# Altium PCB CONTROL_BOARD.PcbDoc
Units mm, origin at the board's own origin, x right, y up, seen from the top; angles counter-clockwise.
Board outline 50 x 50 mm, 2 copper layers (Top Layer, Bottom Layer), stack 1.571 mm thick; 35 components, 26 nets, 200 pads, 23 vias.
Unrouted connection lines stored in the file: 3.
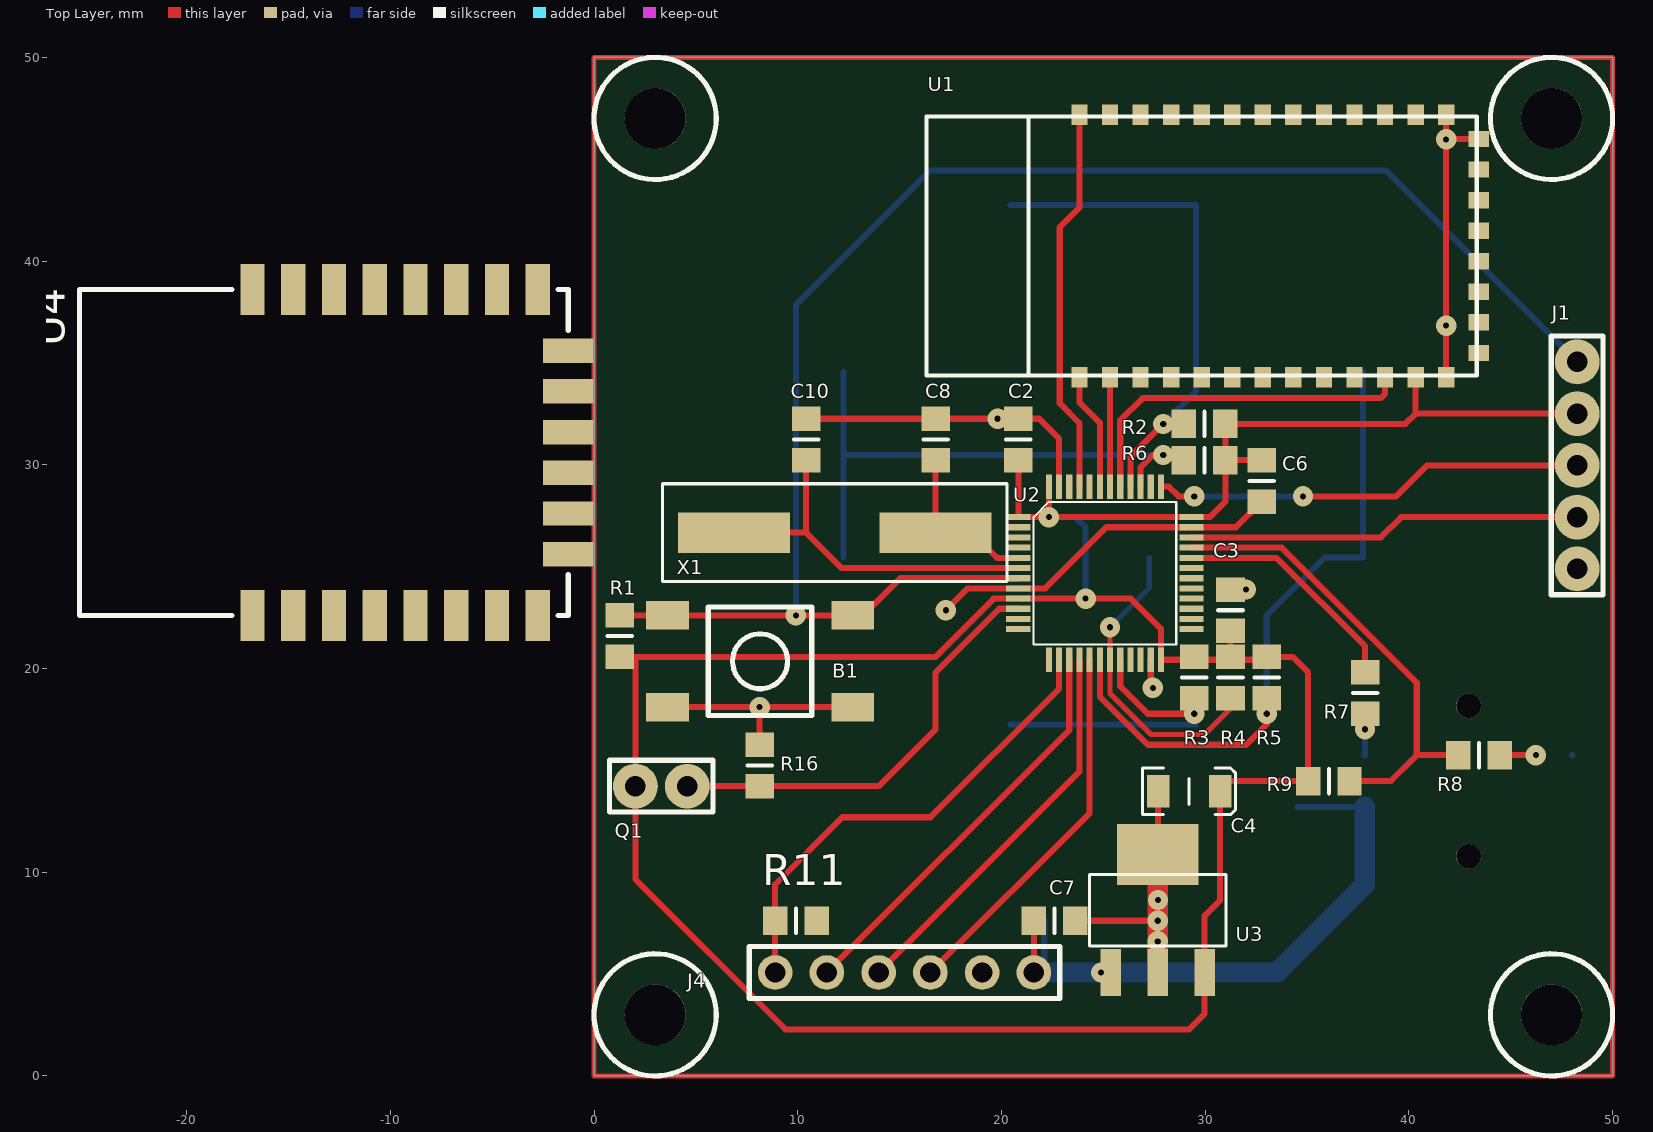
[diagram p0: Top Layer view]
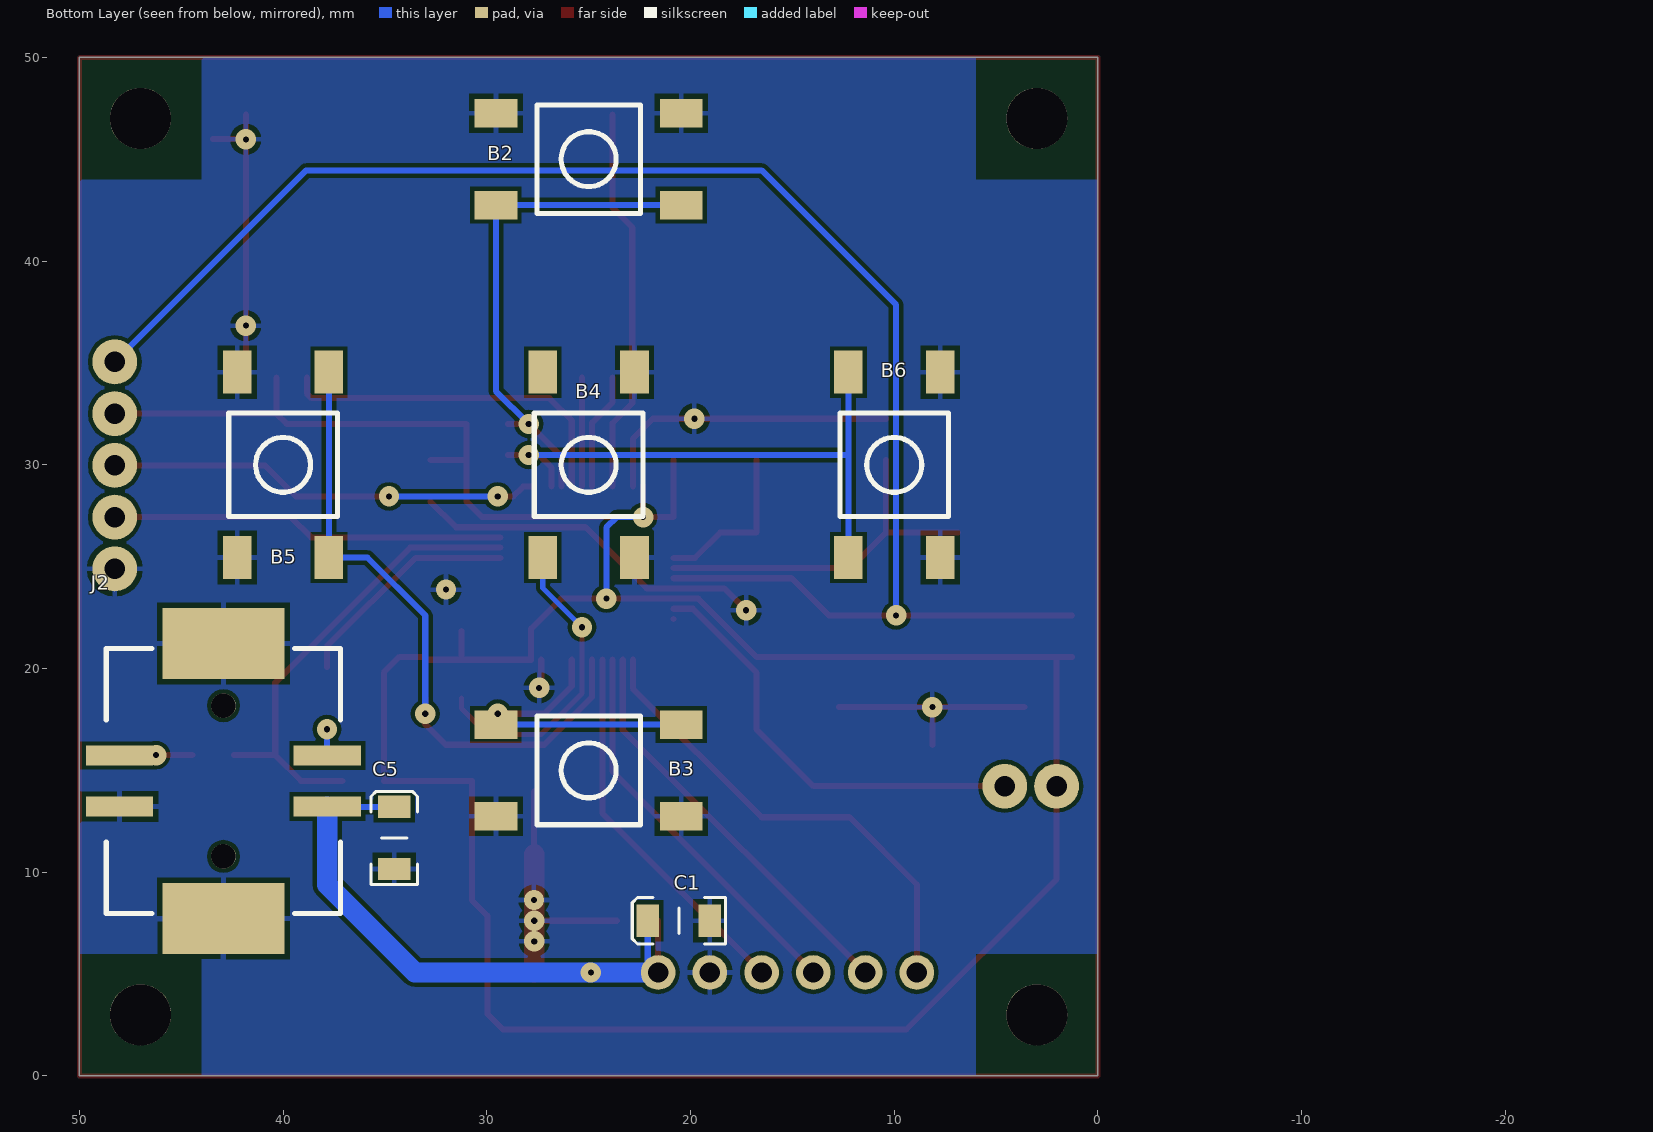
[diagram p1: Bottom Layer view, seen from below]
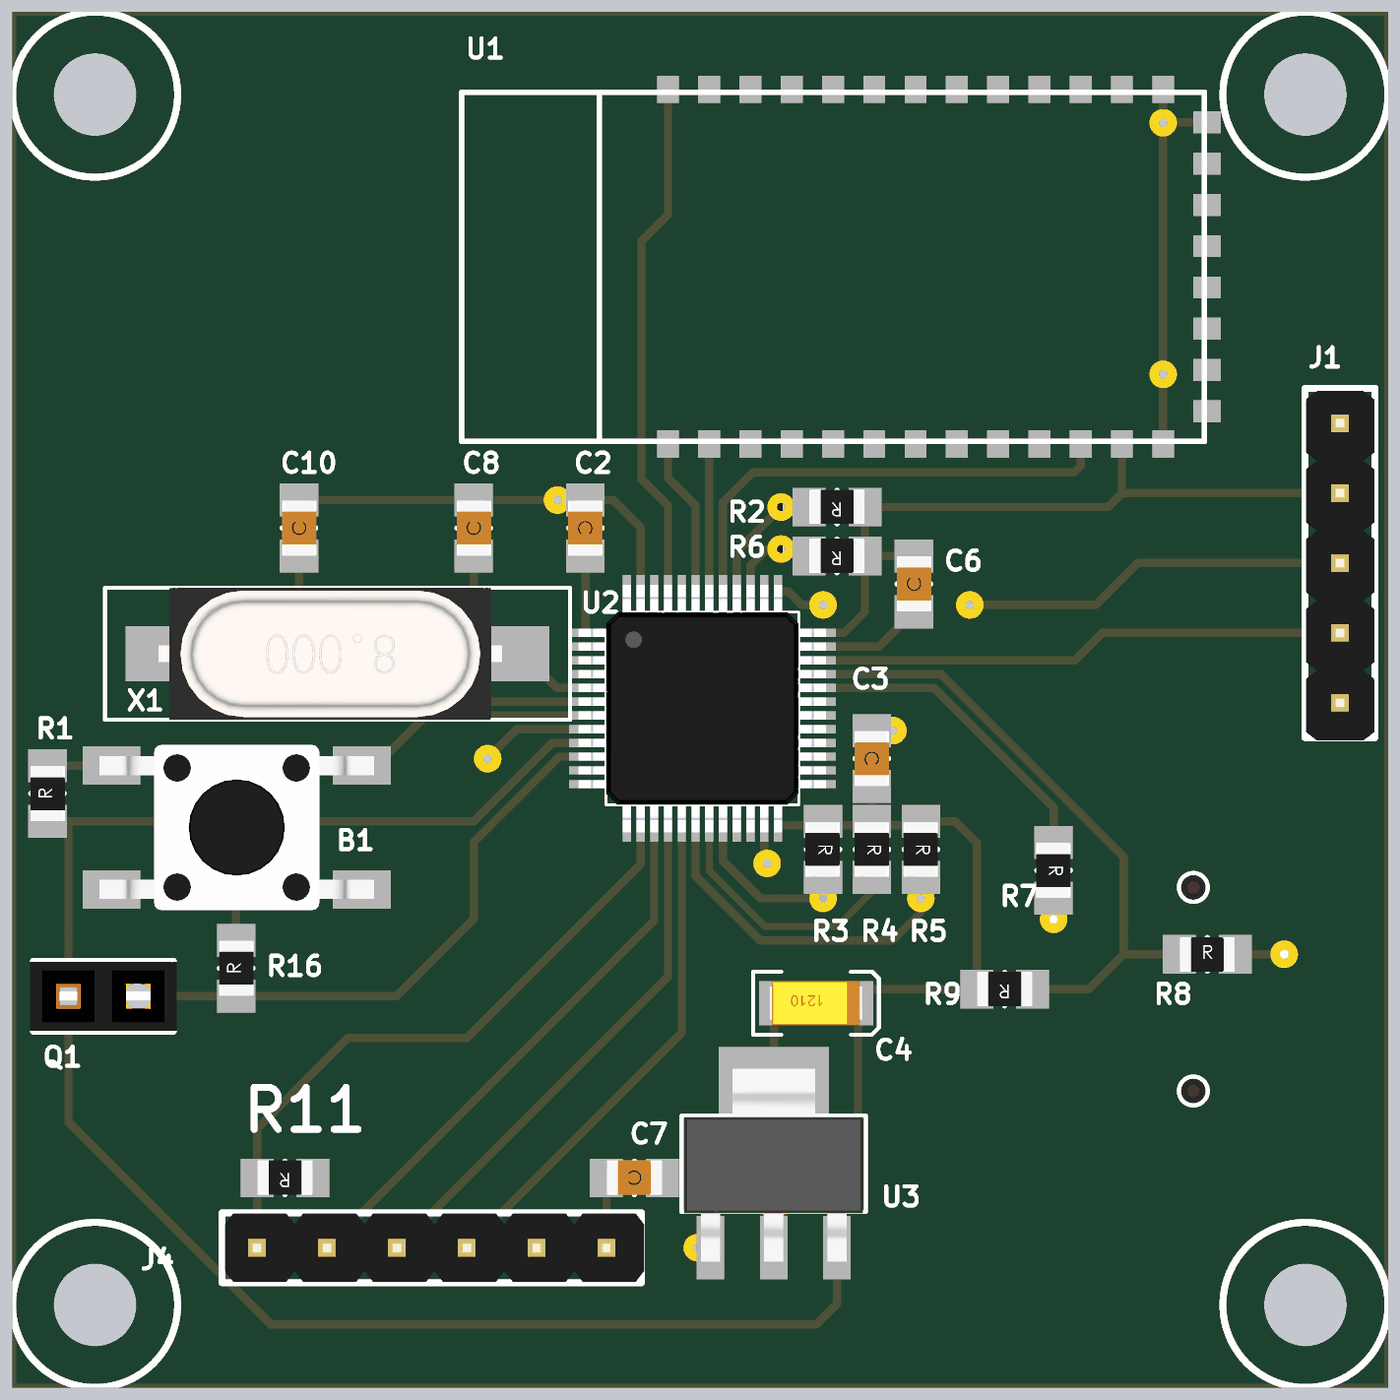
[diagram p2: 3D render of the assembled board from above, using the file's embedded part models]
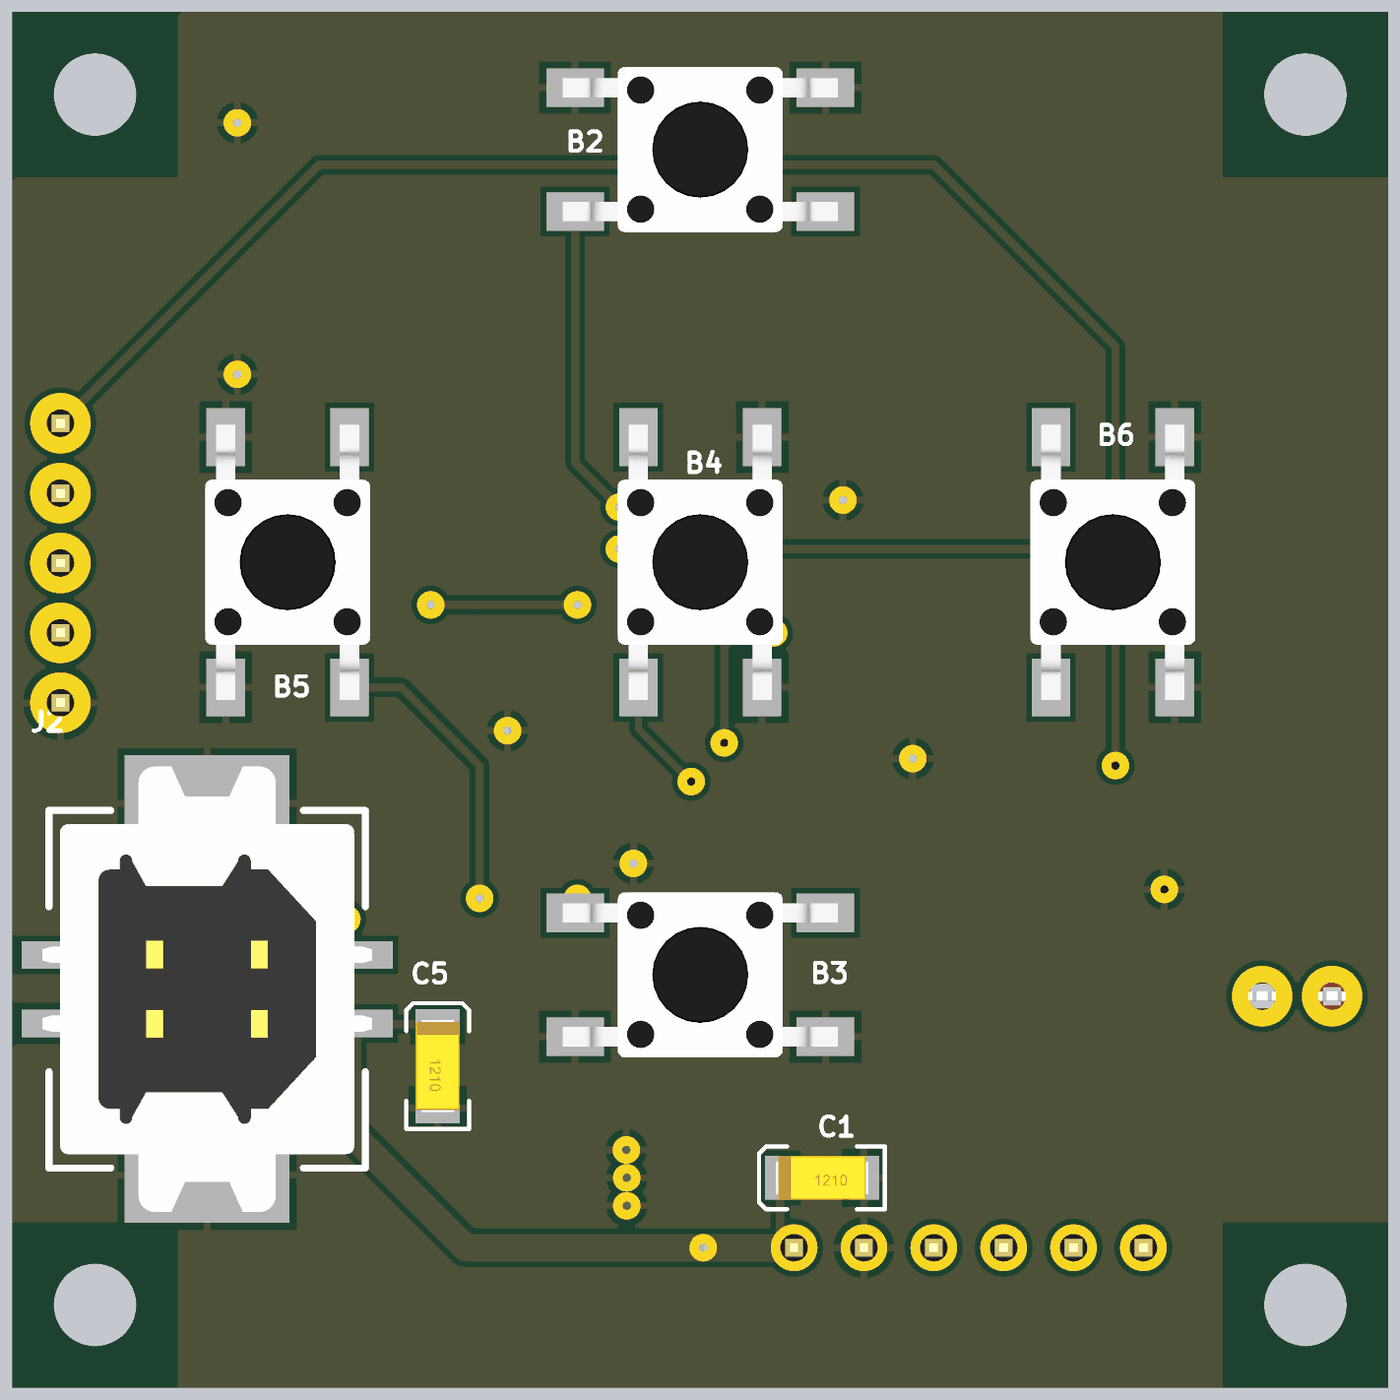
[diagram p3: 3D render of the assembled board from below, using the file's embedded part models]

## Layer stack, top to bottom
Top Solder: solder mask 0.0102, Solder Resist, Dk 3.5
Top Layer: signal copper 0.0356
Dielectric 1: dielectric 1.5, FR-4, Dk 4.8
Bottom Layer: signal copper 0.0356
Bottom Solder: solder mask 0.0102, Solder Resist, Dk 3.5

## Board outline
0,0 50,0 50,50 0,50

## Design rules (kind name [scope] priority, off if disabled: settings)
AssemblyTestPointUsage [All] p1 off:
AssemblyTestpoint [All] p1 off: testpointundercomponent=TRUE minsize=1.016 maxsize=2.54 preferedsize=1.524 minholesize=0 maxholesize=1.016 preferedholesize=0.813 testpointgrid=0.025 usegrid=TRUE gridtolerance=0 allowsidetop=TRUE allowsidebottom=TRUE
Clearance Top_GND_Polly [InPolygon and InNet('GND_12V')] p1: gap=0.25 ignorepadtopadclearanceinfootprint=FALSE except(0: Arc-Hole Track-Hole SMDPad-Hole THPad-Hole Via-Hole Fill-Hole Poly-Hole Region-Hole Text-Hole)
Clearance [All] p2: gap=0.2 ignorepadtopadclearanceinfootprint=FALSE except(0: Arc-Hole Track-Hole SMDPad-Hole THPad-Hole Via-Hole Fill-Hole Poly-Hole Region-Hole Text-Hole)
ComponentClearance [All] p1 off: gap=0.254 collisioncheckmode=3 verticalgap=0.254 showdistances=FALSE
FabricationTestPointUsage [All] p1 off: valid=0 allowmultiple=FALSE
FabricationTestpoint [All] p1 off: side=3 testpointundercomponent=TRUE minsize=1.016 maxsize=2.54 preferedsize=1.524 minholesize=0 maxholesize=1.016 preferedholesize=0.813 testpointgrid=0.025 allowsidetop=TRUE allowsidebottom=TRUE usegrid=TRUE gridtolerance=0
Height [All] p1 off: minheight=0 maxheight=25.4 prefheight=12.7
HoleSize [All] p1: absolutevalues=TRUE maxlimit=5 minlimit=0.25 maxpercent=80.000 minpercent=20.000
HoleToHoleClearance [All] p1: gap=0.25 allowstackedmicrovias=TRUE
MinimumAnnularRing PadOutsideLayers_large [IsPad AND (PadIsPlated = 'True') AND (AsMM(HoleSize) > 0.45)] p1: minimumring=0.25
MinimumAnnularRing PadOutsideLayers_small [IsPad AND (PadIsPlated = 'True') AND (AsMM(HoleSize) <= 0.45)] p2: minimumring=0.225
MinimumAnnularRing ViaOutsideLayers_large [IsVia AND (AsMM(HoleSize) > 0.45)] p3: minimumring=0.25
MinimumAnnularRing ViaOutsideLayers_small [IsVia AND (AsMM(HoleSize) <= 0.45)] p4: minimumring=0.225
MinimumSolderMaskSliver [All] p1: minsoldermaskwidth=0.25
MinimumSolderMaskSliver SilkscreenOverComponentPads [All] p2: minsoldermaskwidth=0.254
PlaneClearance [All] p1: clearance=0.5
PlaneConnect [All] p1: planeconnectstyle=Relief reliefexpansion=0.5 reliefentries=4 reliefconductorwidth=0.25 reliefairgap=0.25
PolygonConnect [All] p1: connectstyle=Relief reliefconductorwidth=0.25 reliefentries=4 polygonreliefangle="90 Angle" airgapwidth=0.254
RoutingCorners [All] p1: cornerstyle=45-Degree minsetback=2 maxsetback=2
RoutingVias [All] p1: holewidth=0.3 width=0.75 viastyle="Through Hole" minholewidth=0.25 minwidth=0.65 maxholewidth=1 maxwidth=3
SilkToSilkClearance [All] p1: silktosilkclearance=0.15
SolderMaskExpansion [All] p1: expansion=0
Width [All] p1: maxlimit=10 minlimit=0.15 preferedwidth=0.3
17 further rules are at their usual default settings.

## Components (designator, comment, footprint, x,y, rotation, side; value= is the part's Value field where it differs from the comment)
B1 "RESET" FP_BTN_SMD 8.15,20.356 r90 top
B2 "UP" FP_BTN_SMD 25,45 r90 bottom
B3 "DOWN" FP_BTN_SMD 25,15 r270 bottom
B4 "MENU/OK" FP_BTN_SMD 25,30 r180 bottom locked
B5 "LEFT" FP_BTN_SMD 40,30 r0 bottom
B6 "RIGHT" FP_BTN_SMD 10,30 r180 bottom
C1 "10u" "CAP 1210" 19.05,7.62 r0 bottom
C2 "100n" "CAP 0805" 20.828,32.258 r270 top
C3 "100n" "CAP 0805" 31.242,23.876 r270 top
C4 "10u" "CAP 1210" 27.686,13.97 r0 top
C5 "10u" "CAP 1210" 34.544,10.16 r90 bottom
C6 "100n" "CAP 0805" 32.766,28.194 r90 top
C7 "100n" "CAP 0805" 23.622,7.62 r180 top
C8 "15p" "CAP 0805" 16.764,30.226 r90 top
C10 "15p" "CAP 0805" 10.414,30.226 r90 top
J1 "5" SIL5 48.26,35.052 r270 top
J2 "USB_B" USB_B_STAND 42.926,14.478 r270 bottom
J4 "6" SIL6 8.89,5.08 r0 top
Q1 "*" HEADER2 2.032,14.224 r0 top
R1 "10k" "RES 0805" 1.27,20.574 r90 top
R2 "10k" "RES 0805" 30.988,32.004 r180 top
R3 "10k" "RES 0805" 29.464,20.574 r270 top
R4 "10k" "RES 0805" 31.242,20.574 r270 top
R5 "10k" "RES 0805" 33.02,20.574 r270 top
R6 "10k" "RES 0805" 30.988,30.226 r180 top
R7 "22" "RES 0805" 37.846,19.812 r270 top
R8 "22" "RES 0805" 42.418,15.748 r0 top
R9 "1k5" "RES 0805" 37.084,14.478 r180 top
R11 "1k" "RES 0805" 10.922,7.62 r180 top
R16 "2k" "RES 0805" 8.128,14.224 r90 top
U1 "HC-05" HC-05 43.328,34.39 r90 top
U2 "STM32F070CB" LQFP48 20.828,27.432 r270 top
U3 "LM2937-3.3V" SOT223 25.372,5.08 r0 top
U4 "ESP8266-12E" ESP8266-12E -16.764,22.608 r90 top
X1 "8MHz" QUARTZ_SMD 6.864,26.67 r180 top

## Footprints (in the part's own frame and the unit in brackets; to place one, negate y for a bottom-side part, rotate by r counter-clockwise, add the part's x,y. Pads: shape width x height; smd on the part's side, far side on the other; paste and mask are expansions set on the pad)
"CAP 0805" [mm] "0805 CAPACITOR"
  rect 1.2x1.4 smd: 1(0,0) 2(2.032,0)
  silkscreen extent 1.02,-0.6 1.02,0.6, body extent 0.02,-0.64 2.02,0.62, height 0.6
"CAP 1210" [mm] "POLARIZED CAPACITOR"
  rect 1.1x1.6 smd: 1(0,0) 2(3.048,0)
  silkscreen extent -0.76,-1.14 3.81,1.14, body extent -0.17,-0.8 3.22,0.8, height 1.65
ESP8266-12E [mm] "WiFi module"
  rect 2.5x1.2 smd: 1(0,0) 2(0,-2) 3(0,-4) 4(0,-6) 5(0,-8) 6(0,-10) 7(0,-12) 8(0,-14) 15(16,-14) 16(16,-12) 17(16,-10) 18(16,-8) 19(16,-6) 20(16,-4) 21(16,-2) 22(16,0)
  rect 1.2x2.5 smd: 9(3,-15.5) 10(5,-15.5) 11(7,-15.5) 12(9,-15.5) 13(11,-15.5) 14(13,-15.5)
  silkscreen extent 0,-15.5 16,8.5, body extent -0.01,-15.5 16.01,8.5, height 2.65
FP_BTN_SMD [mm] "SMD Push Button 6x6mm"
  rect 1.4x2.1 smd: 1(2.25,4.55) 2(2.25,-4.55) 3(-2.25,4.55) 4(-2.25,-4.55)
  silkscreen extent -2.67,-2.54 2.67,2.54, body extent -3,-5 3,5, height 5.1
HC-05 [mm]
  rect 1x0.8 smd: 1(-0.1,19.5) 2(-0.1,18) 3(-0.1,16.5) 4(-0.1,15) 5(-0.1,13.5) 6(-0.1,12) 7(-0.1,10.5) 8(-0.1,9) 9(-0.1,7.5) 10(-0.1,6) 11(-0.1,4.5) 12(-0.1,3) 13(-0.1,1.5) 22(12.8,1.5) 23(12.8,3) 24(12.8,4.5) 25(12.8,6) 26(12.8,7.5) 27(12.8,9) 28(12.8,10.5) 29(12.8,12) 30(12.8,13.5) 31(12.8,15) 32(12.8,16.5) 33(12.8,18) 34(12.8,19.5)
  rect 0.8x1 smd: 14(1.1,-0.1) 15(2.6,-0.1) 16(4.1,-0.1) 17(5.6,-0.1) 18(7.1,-0.1) 19(8.6,-0.1) 20(10.1,-0.1) 21(11.6,-0.1)
  silkscreen extent 0,0 12.7,27, body extent 0,0 12.7,27, height 1.5
HEADER2 [mm] "2 PIN SIL HEADER"
  round 2.2 hole 1: 1(0,0) 2(2.54,0)
  silkscreen extent -1.27,-1.27 3.81,1.27, body extent -1.39,-1.25 3.94,1.25, height 8.6
LQFP48 [mm] "48pin 0.5mm"
  rect 0.3x1.2 smd: 1(0,0) 2(0.5,0) 3(1,0) 4(1.5,0) 5(2,0) 6(2.5,0) 7(3,0) 8(3.5,0) 9(4,0) 10(4.5,0) 11(5,0) 12(5.5,0) 25(5.5,8.5) 26(5,8.5) 27(4.5,8.5) 28(4,8.5) 29(3.5,8.5) 30(3,8.5) 31(2.5,8.5) 32(2,8.5) 33(1.5,8.5) 34(1,8.5) 35(0.5,8.5) 36(0,8.5)
  rect 1.2x0.3 smd: 13(7,1.5) 14(7,2) 15(7,2.5) 16(7,3) 17(7,3.5) 18(7,4) 19(7,4.5) 20(7,5) 21(7,5.5) 22(7,6) 23(7,6.5) 24(7,7) 37(-1.5,7) 38(-1.5,6.5) 39(-1.5,6) 40(-1.5,5.5) 41(-1.5,5) 42(-1.5,4.5) 43(-1.5,4) 44(-1.5,3.5) 45(-1.5,3) 46(-1.5,2.5) 47(-1.5,2) 48(-1.5,1.5)
  round 0.5 on Top Overlay: ""(0,1.5)
  silkscreen extent -0.75,0.75 6.25,7.75, body extent -1.75,-0.25 7.25,8.75, height 1.5
QUARTZ_SMD [mm]
  rect 5.5x2 smd: 1(-9.9,0) 2(0,0)
  silkscreen extent -13.4,-2.4 3.5,2.4, body extent -10.94,-2.4 1.56,2.4, height 4.05
"RES 0805" [mm] "0805 Resistor"
  rect 1.2x1.4 smd: 1(0,0) 2(2.032,0)
  silkscreen extent 1.02,-0.6 1.02,0.6, body extent 0.02,-0.64 2.02,0.62, height 0.6
SIL5 [mm] "5 PIN SINGLE IN LINE CONNECTOR"
  round 2.2 hole 1: 1(0,0) 2(2.54,0) 3(5.08,0) 4(7.62,0) 5(10.16,0)
  silkscreen extent -1.27,-1.27 11.43,1.27, body extent -1.17,-1.25 11.53,1.25, height 8.3
SIL6 [mm] "6 PIN SINGLE IN LINE CONNECTOR"
  round 1.7 hole 1: 1(0,0) 2(2.54,0) 3(5.08,0) 4(7.62,0) 5(10.16,0) 6(12.7,0)
  silkscreen extent -1.27,-1.27 13.97,1.27, body extent -1.17,-1.25 14.07,1.25, height 8.3
SOT223 [mm]
  rect 1x2.3 smd: 1(0,0) 2(2.3,0) 3(4.6,0)
  rect 4x3 smd: 2(2.3,5.8)
  silkscreen extent -1.05,1.3 5.65,4.8, body extent -0.95,-0.5 5.55,6.5, height 1.64
USB_B_STAND [mm] "USB-B connector"
  rect 1x3.3 smd: 1(1.25,5.1) 2(-1.25,5.1) 3(-1.25,-5.1) 4(1.25,-5.1)
  rect 3.5x6 smd: ""(-6.75,0) ""(6.75,0)
  round 1.2 hole 1.2 unplated: ""(-3.7,0) ""(3.7,0)
  silkscreen extent -6.5,-5.75 6.5,5.75, body extent -8.1,-6 8.1,6, height 15

## Part data
B1 B2 B3 B4 B5 B6: library part Button, "Push button"
  B1: Name=RESET
  B2: Name=UP
  B3: Name=DOWN
  B4: Name=MENU/OK
  B5: Name=LEFT
  B6: Name=RIGHT
C1 C4 C5: library part CAP_POL, "POLARIZED CAPACITOR"
C2 C3 C6 C7 C8 C10: library part CAP, "NON POLARIZED CAPACITOR"
J1: library part HEADER5, "5 PIN HEADER"
J2: library part USB, "USB_B TYPE CONNECTOR"
J4: library part HEADER6, "6 PIN HEADER"
Q1: library part Phototransistor
R1 R2 R3 R4 R5 R6 R7 R8 R9 R11 R16: library part RES, "RESISTOR"
U1: "Blutooth Module (M/S)"
U2: library part STM32F070CB_RB, "32bit ARM Cortex M0"
U3: library part LM2937, "SOT223"
U4: "WiFi module"
X1: library part QUARTZ, "QUARTZ CRYSTAL"

## Free pads (board coordinates)
  round 3 hole 3 unplated: 0(3,3) 0(3,47) 0(47,3) 0(47,47)

## Via types
v1: diameter 1, hole 0.3, Top Layer to Bottom Layer, 23 vias

## Nets (pads, with @x,y where several pads share a name; then routed paths per layer and width w, separated by ;. In a path a pad name is that pad's centre, name@x,y a point inside that pad or via, vN(x,y) a via of type N, cw(c..) or ccw(c..) an arc to the next point about the centre after c; other vN are vias at no path point)
8MHZ_OSCIN: C8.1 U2.5 X1.1 | length 8.1
  Top Layer w0.3: C8.1 X1.1 18.542,26.67 19.78,25.432 U2.5
8MHZ_OSCOUT: C10.1 U2.6 X1.2 | length 18.2
  Top Layer w0.3: X1.2 10.414,26.67 ; C10.1 10.414,26.67 ; U2.6 12.152,24.932 10.414,26.67
BT_MODE: U1.34 U2.45 | length 19.1
  Top Layer w0.3: U2.45 23.828,32.052 22.86,33.02 22.86,41.656 23.828,42.624 U1.34
BT_RST: U1.11 U2.41 | length 17.6
  Top Layer w0.3: U2.41 25.828,32.178 26.924,33.274 38.608,33.274 38.828,33.494 U1.11
BUTTON_1: B4.4 R4.2 U2.19 | length 15.2
  Top Layer w0.254: v1(25.328,22.026) U2.19 25.328,18.781 27.345,16.764 29.972,16.764 31.242,18.034 R4.2
  Bottom Layer w0.254: v1(25.328,22.026) 27.25,23.948 B4.4
BUTTON_2: B5.3 B5.4 R5.2 U2.18 | length 32.5
  Top Layer w0.3: U2.18 24.828,18.606 27.178,16.256 32.004,16.256 33.02,17.272 v1(33.02,17.78) R5.2
  Bottom Layer w0.3: v1(33.02,17.78) 33.02,22.606 35.864,25.45 B5.3 B5.4
BUTTON_3: B3.3 B3.4 R3.2 U2.20 | length 14.6
  Top Layer w0.3: U2.20 25.828,19.13 27.178,17.78 v1(29.464,17.78)
  Bottom Layer w0.3: B3.3 B3.4
BUTTON_4: B6.3 B6.4 R6.2 U2.39 | length 28.1
  Top Layer w0.3: U2.39 26.828,29.876 27.432,30.48 v1(27.94,30.48) R6.2@28.956,30.48
  Bottom Layer w0.3: B6.4 12.25,30.48 ; B6.3 12.25,30.48 ; v1(27.94,30.48) 12.25,30.48
BUTTON_5: B2.3 B2.4 R2.2 U2.40 | length 25.3
  Top Layer w0.3: U2.40 26.328,30.392 v1(27.94,32.004) R2.2
  Bottom Layer w0.3: B2.4 B2.3 29.55,33.614 v1(27.94,32.004)
GND: B1.3 B1.4 B2.1 B2.2 B3.1 B3.2 B4.1 B4.2 B5.1 B5.2 B6.1 B6.2 C1.1 C2.1 C3.1 C4.1 C5.1 C6.1 C7.1 C8.2 C10.2 J1.5 J2.4 J2.@42.926,7.728 J2.@42.926,21.228 J4.5 R16.2 U1.13 U1.21 U1.22 U2.8 U2.23 U2.35 U2.47 U3.2 U4.15 | length 72.7
  Top Layer w0.3: B1.3 v1(8.128,18.106) ; R16.2 v1(8.128,18.106) ; C10.2 C8.2 v1(19.812,32.258) C2.1 21.844,32.258 22.828,31.274 U2.47 ; B1.4 v1(8.128,18.106) ; v1(17.272,22.86) 18.344,23.932 U2.8 22.154,23.932 25.154,26.932 U2.35 31.504,26.932 C6.1 ; C7.1 v1(27.672,7.62) ; v1@27.328,19.05 U2.23 ; U3.2@27.672,10.88 27.686,10.894 C4.1 ; U1.13 v1(41.828,36.83) v1(41.828,45.974) ; U1.22 v1(41.828,45.974) ; U1.21 41.844,45.99 v1(41.828,45.974)
  Top Layer w1: U3.2@27.672,5.08 v1(27.672,6.604) v1(27.672,7.62) U3.2@27.672,10.88
  other v1: 27.686,8.636 27.432,19.05 32.004,23.876
LIGHT_SENS: Q1.2 R16.1 U2.10 | length 21.5
  Top Layer w0.3: Q1.2 R16.1 13.97,14.224 16.764,17.018 16.764,19.812 19.884,22.932 U2.10
LOAD: J4.1 R11.2 U2.14 | length 23.7
  Top Layer w0.3: J4.1 R11.2 8.89,9.398 12.192,12.7 16.51,12.7 22.828,19.018 U2.14
MCU_RX: U1.1 U2.43 | length 5.8
  Top Layer w0.3: U1.1 23.828,33.068 24.828,32.068 U2.43
MCU_TX: U1.2 U2.42 | length 5.4
  Top Layer w0.3: U2.42 U1.2
MISO: J4.3 U2.16 | length 19.4
  Top Layer w0.3: J4.3 23.828,14.938 U2.16
MOSI: J4.4 U2.17 | length 18.6
  Top Layer w0.3: J4.4 24.328,12.898 U2.17
NetJ2_2: J2.2 R7.2 | length 1.3
  Bottom Layer w0.3: J2.2 37.846,15.748 v1(37.846,17.018)
NetJ2_3: J2.3 R8.2 | length 1.8
  Top Layer w0.3: R8.2 v1(46.228,15.748)
  Bottom Layer w0.3: J2.3@48.006,15.748 J2.3
RESET: B1.1 B1.2 J1.1 R1.2 U2.7 | length 80.5
  Top Layer w0.3: R1.2 B1.1 v1(9.906,22.606) B1.2 13.208,22.606 15.034,24.432 U2.7
  Bottom Layer w0.3: v1(9.906,22.606) 9.906,37.846 16.51,44.45 38.862,44.45 J1.1
SCK: J4.2 U2.15 | length 20.3
  Top Layer w0.3: J4.2 23.328,16.978 U2.15
SWCLK: J1.3 U2.37 | length 21.3
  Top Layer w0.3: U2.37 28.218,28.932 28.702,28.448 v1(29.464,28.448) ; v1(34.798,28.448) 39.37,28.448 40.894,29.972 J1.3
  Bottom Layer w0.3: v1(29.464,28.448) v1(34.798,28.448)
SWDIO: J1.4 U2.34 | length 19.3
  Top Layer w0.3: U2.34 38.624,26.432 39.624,27.432 J1.4
USB_DM: R7.1 U2.32 | length 11.3
  Top Layer w0.3: U2.32 33.496,25.432 37.846,21.082 R7.1@37.846,20.066
USB_DP: R8.1 R9.1 U2.33 | length 23.2
  Top Layer w0.3: U2.33 33.758,25.932 40.386,19.304 40.386,15.748 ; R9.1 39.116,14.478 40.386,15.748 ; R8.1 40.386,15.748
VCC_+3V3: C2.2 C3.2 C4.2 C6.2 J1.2 Q1.1 R1.1 R2.1 R3.1 R4.1 R5.1 R6.1 R9.2 U1.12 U2.1 U2.9 U2.24 U2.36 U2.48 U3.3 U4.8 | length 147.2
  Top Layer w0.3: R1.1 2.032,20.574 ; C2.2 U2.1 v1(22.328,27.432) ; U2.48 v1(22.328,27.432) ; R4.1 C3.2 ; C6.2 R6.1 ; R5.1@33.02,20.432 U2.24 27.828,21.956 26.352,23.432 v1(24.13,23.432) U2.9 19.622,23.432 16.764,20.574 2.032,20.574 ; R5.1 34.29,20.574 35.052,19.812 R9.2@35.052,14.732 ; R9.2 30.734,14.478 C4.2 30.734,8.636 29.972,7.874 U3.3 29.972,3.048 29.21,2.286 9.398,2.286 2.032,9.652 Q1.1 2.032,20.574 ; U1.12 40.328,32.512 ; J1.2 40.328,32.512 ; v1(22.328,27.432) U2.36 30.226,27.432 30.988,28.194 R6.1 ; R6.1 R2.1 39.82,32.004 40.328,32.512
  Bottom Layer w0.3: v1(22.328,27.432) 23.622,27.432 24.13,26.924 v1(24.13,23.432)
VCC_+5V_1.5A: C1.2 C5.2 C7.2 J2.1 J4.6 R11.1 U3.1 | length 30.2
  Top Layer w0.3: J4.6 C7.2
  Bottom Layer w0.3: J4.6@22.098,5.08 C1.2 ; C5.2 37.806,13.208 J2.1
  Bottom Layer w1: J4.6 22.098,5.08 v1(24.892,5.08) 33.528,5.08 37.826,9.378 J2.1
pads on no net: B4.3 J2.@42.926,10.778 J2.@42.926,18.178 U1.3 U1.4 U1.5 U1.6 U1.7 U1.8 U1.9 U1.10 U1.14 U1.15 U1.16 U1.17 U1.18 U1.19 U1.20 U1.23 U1.24 U1.25 U1.26 U1.27 U1.28 U1.29 U1.30 U1.31 U1.32 U1.33 U2. U2.2 U2.3 U2.4 U2.11 U2.12 U2.13 U2.21 U2.22 U2.25 U2.26 U2.27 U2.28 U2.29 U2.30 U2.31 U2.38 U2.44 U2.46 U4.1 U4.2 U4.3 U4.4 U4.5 U4.6 U4.7 U4.9 U4.10 U4.11 U4.12 U4.13 U4.14 U4.16 U4.17 U4.18 U4.19 U4.20 U4.21 U4.22
copper on no net: | length 200
  Top Layer w0.254: 0,0 0,50 50,50 50,0 0,0

## Polygon pours and split planes (outlines as drawn)
GND on Bottom Layer "BGND" (solid, pour order 0): 0,50 50,50 50,0 0,0

## Other copper
Bottom Layer:
  pour cut-out: 6,50 6,44 0,44 0,50
  pour cut-out: 50,44 44,44 44,50 50,50
  pour cut-out: 44,0 44,6 50,6 50,0
  pour cut-out: 0,6 6,6 6,0 0,0

## Silkscreen, mask and mechanical layers (free items; w line width, h text height)
Top Overlay:
  circle w0.254: c47,3 r3
  circle w0.254: c3,3 r3
  circle w0.254: c3,47 r3
  circle w0.254: c47,47 r3
Mechanical 1:
  circle w0.254: c25,25 r15
  lines w0.254: 10,25 40,25 ; 25,10 25,40